# EAGLE board lm3410 (EAGLE 6.4)
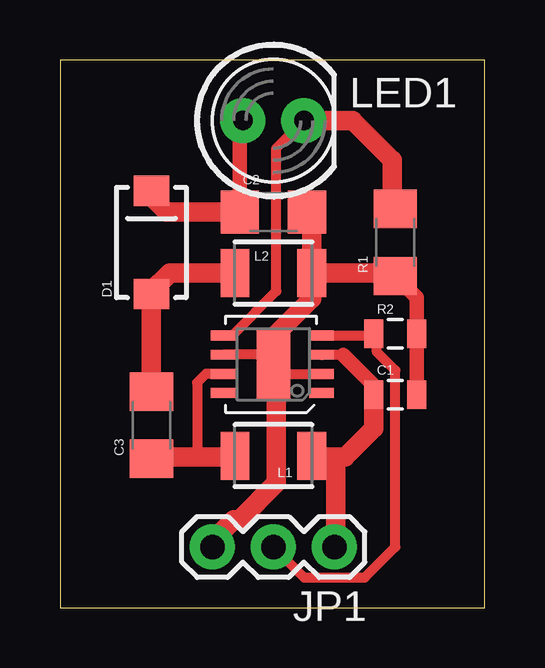
[diagram p0: board, top side]

Size 17.7 x 22.85 mm. Coordinates in mm from the lower left corner, seen from the top.
Outline: 0,0 17.7,0 17.7,22.85 0,22.85 0,0
Copper layers (1*16): Top 0.035mm / dielectric 1.5mm / Bottom 0.035mm
Design rules "default": minimum track width 10mil, minimum drill 24mil, track to track 8mil, track to pad 8mil, pad to pad 8mil, via to via 8mil, smd to smd 8mil, copper to edge 40mil, drill to drill 8mil, minimum pad ring 10mil, minimum via ring 8mil, stop-mask expansion 4mil, vias tented up to drill 0mil, thermal gap 10mil

## Footprints (pad centres in the part's own frame; a part is rotated, then mirrored left to right if it is on the bottom)
0805 = smd 0.8 x 1.2: 1 -0.9,0; 2 0.9,0
1206 = smd 1.6 x 1.8: 1 -1.4,0; 2 1.4,0
SMA-DIODE = smd 1.27 x 1.47: A -2.15,0; C 2.15,0
1X03 = drill 1.016 pad 1.88: 1 0,0; 2 2.54,0; 3 5.08,0
1210 = smd 1.2 x 2: 1 -1.6,0; 2 1.6,0
LED5MM = drill 0.813 pad 1.88: A -1.27,0; K 1.27,0
MSOP-8 = smd 0.41 x 1.02: 1 -1.2,-2; 2 -0.4,-2; 3 0.4,-2; 4 1.2,-2; 5 1.2,2.1; 6 0.4,2.1; 7 -0.4,2.1; 8 -1.2,2.1 | smd 3 x 1.4: 9 0,0

## Placement (x,y rotation side)
C1  10uF  [0805]  13.97,8.89 0 top
C2  10uF  [1206]  8.89,16.51 0 top
C3  2.2uF  [1206]  3.81,7.62 90 top
D1  DIODE-SCHOTTKY_  [SMA-DIODE]  3.81,15.24 90 top
JP1  [1X03]  11.43,2.54 180 top
L1  4.7uH  [1210]  8.89,6.35 180 top
L2  4.7uH  [1210]  8.89,13.97 0 top
LED1  [LED5MM]  8.89,20.32 0 top
R1  0.2  [1206]  13.97,15.24 90 top
R2  100k  [0805]  13.97,11.43 0 top
U$1  LM3410-MSOP-8  [MSOP-8]  8.89,10.16 90 top

## Library data of the parts
C1-C3 = SparkFun-Capacitors
D1 = SparkFun-DiscreteSemi
JP1 = SparkFun-Connectors
L1 L2 = SparkFun-Passives
LED1 = SparkFun-LED
R1 R2 = SparkFun-Resistors
U$1 = Synapseware

## Nets
DIM: JP1.2 R2.1 U$1.4
GND: C1.2 C2.2 JP1.3 L2.2 R1.1 R2.2 U$1.2 U$1.6 U$1.9
N$6: LED1.K R1.2 U$1.5
N$8: C3.1 L1.2 U$1.7
N$9: C3.2 D1.A L2.1
N$12: C2.1 D1.C LED1.A
VCC: C1.1 JP1.1 L1.1 U$1.3

## Tracks (layer width: path | path; a pad name or v marks a point on that pad's centre or on a via)
DIM
  Top 0.254: 13.03,11.18 R2.1 | 9.04,2.44 JP1.2
  Top 0.406: U$1.4 13,11.36 R2.1 13.21,11.29 13.21,10.67 13.97,9.91 13.97,2.54 12.7,1.27 10.16,1.27 JP1.2
GND
  Top 0.254: 6.81,10.57 U$1.6 | 8.64,10.57 U$1.9 9.04,9.75 | 10.87,9.75 U$1.2
  Top 0.406: 8.64,10.57 6.81,10.57 | 9.04,9.75 10.87,9.75
  Top 0.61: 10.49,16.31 C2.2 | 13.84,13.97 R1.1 14.87,12.94 R2.2 C1.2 | L2.2 10.49,12.9 | 8.89,11.3 U$1.9
  Top 0.813: 10.49,16.31 L2.2 13.84,13.97 | JP1.3 6.35,2.79 7.24,3.68 7.49,3.68 9.02,5.21 9.02,10.03 U$1.9 | 8.89,11.3 10.49,12.9
N$6
  Top 0.254: 6.81,11.38 U$1.5 | 10.06,20.12 LED1.K
  Top 0.406: 6.81,11.38 7.19,11.38 9.02,13.21 9.02,19.18 LED1.K
  Top 0.61: 13.84,16.77 R1.2
  Top 0.813: 13.84,16.77 13.84,18.67 12.19,20.32 LED1.K
N$8
  Top 0.254: 3.96,6.3 C3.1 | 7.21,6.3 L1.2
  Top 0.406: U$1.7 6.08,9.76 5.71,9.4 5.71,6.3
  Top 0.813: 7.21,6.3 5.71,6.3 3.96,6.3
N$9
  Top 0.61: D1.A 3.81,13.21
  Top 0.813: C3.2 D1.A | 3.81,13.21 4.57,13.97 L2.1
N$12
  Top 0.61: D1.C 3.81,17.14 | C2.1 7.49,20.19 LED1.A
  Top 0.813: 3.81,17.14 4.45,16.51 C2.1
VCC
  Top 0.254: 13.03,8.79 C1.1 | 10.67,6.3 L1.1 | 11.48,2.64 JP1.1
  Top 0.406: 13.03,8.79 13.03,9.32 | 11.81,10.54 10.91,10.54 U$1.3
  Top 0.61: 13.03,9.32 11.81,10.54
  Top 0.813: 11.48,6.3 10.67,6.3 | 11.48,6.3 11.48,2.64 | 11.48,6.3 11.89,6.3 13.08,7.49 13.08,8.88 C1.1